# Altium PCB 手动分控1.0F.PcbDoc
Units mil, origin at the board's own origin, x right, y up, seen from the top; angles counter-clockwise.
Board outline 4830.86 x 2596.17 mil, 2 copper layers (Top Layer, Bottom Layer); 104 components, 86 nets, 354 pads, 39 vias.
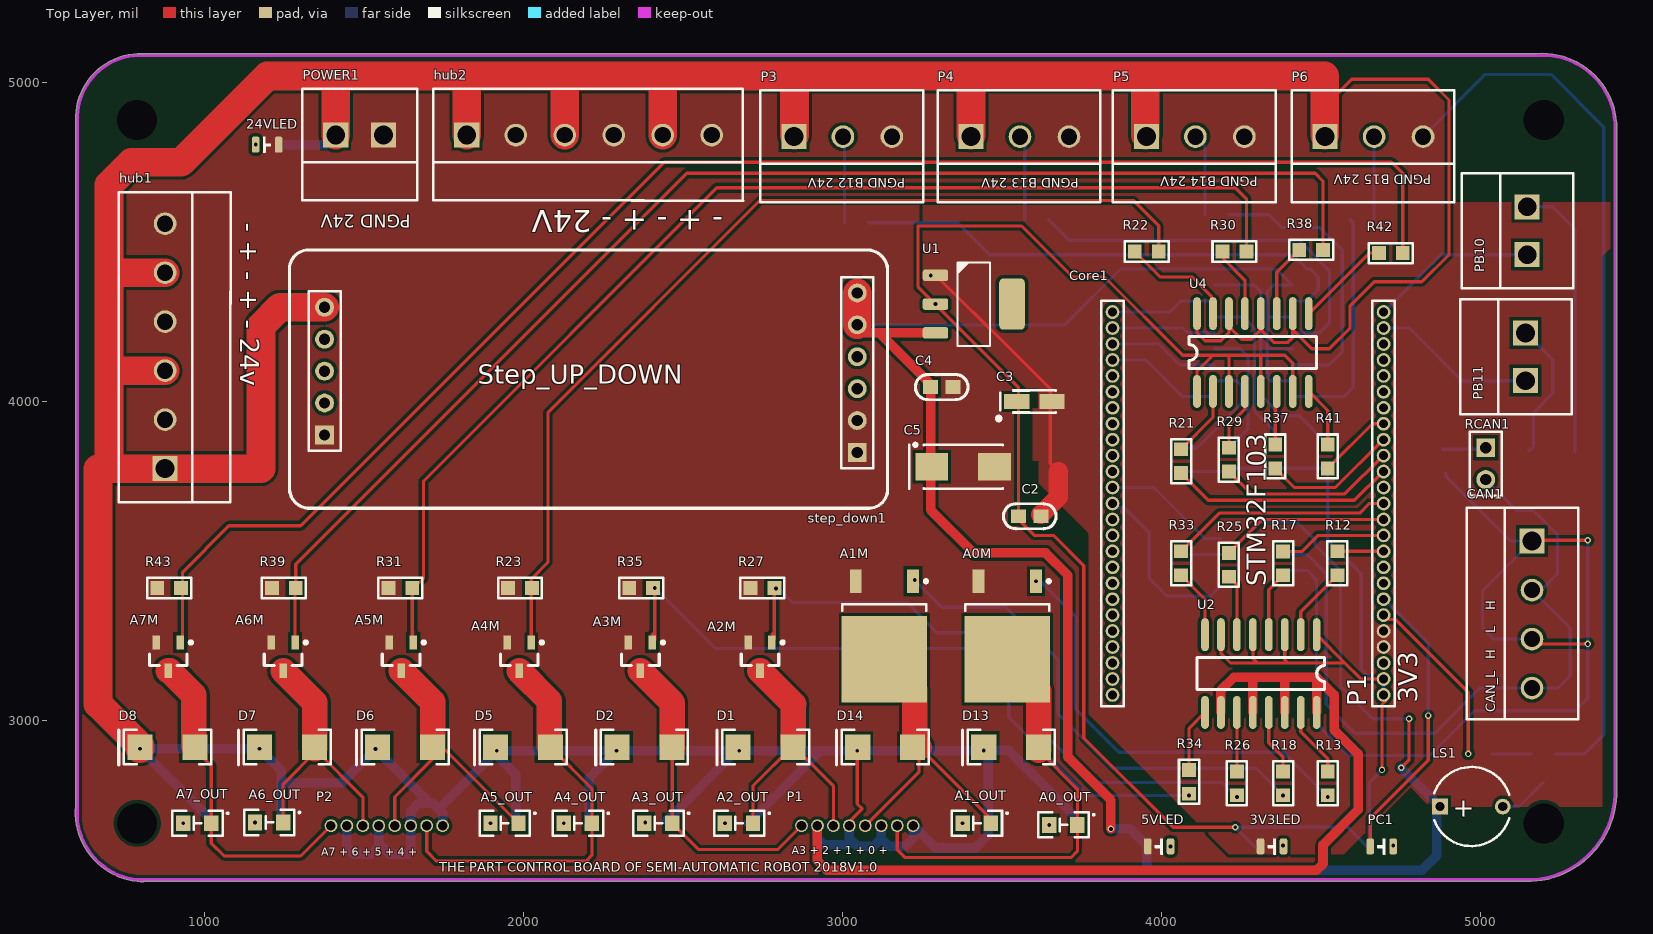
[diagram p0: Top Layer view]
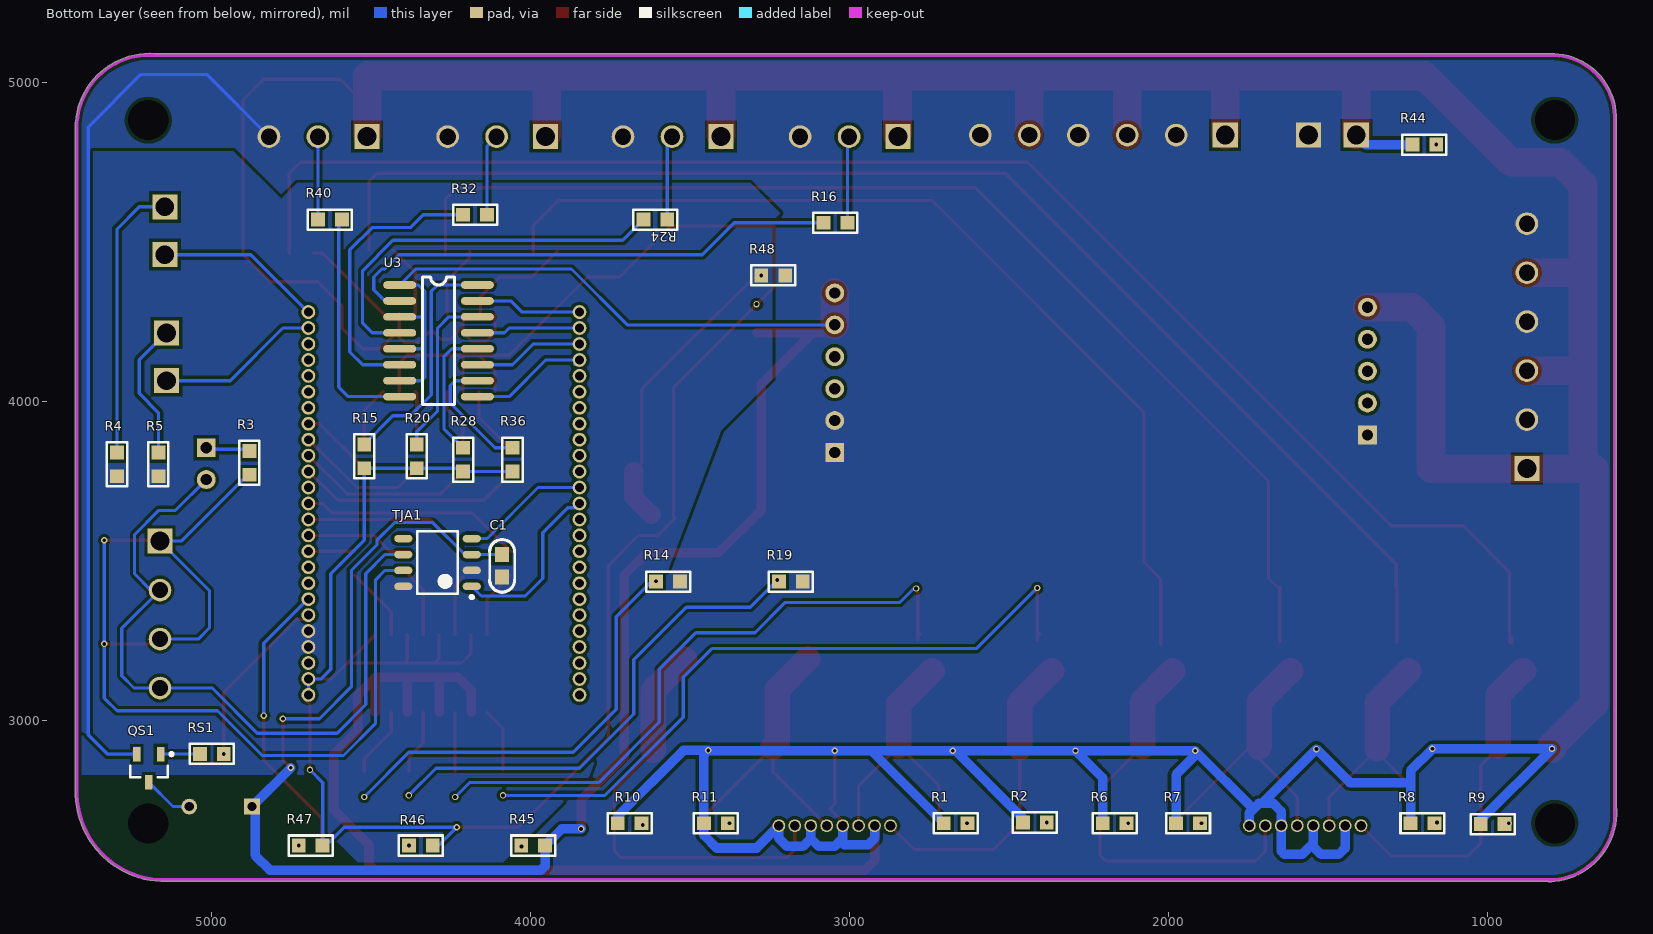
[diagram p1: Bottom Layer view, seen from below]

## Layer stack, top to bottom
Top Solder: solder mask 0.4, Solder Resist, Dk 3.5
Top Layer: signal copper 1.4
Dielectric1: dielectric 12.6, FR-4, Dk 4.8
Bottom Layer: signal copper 1.4
Bottom Solder: solder mask 0.4, Solder Resist, Dk 3.5

## Board outline
788.49,2495.51 ccw(c789.6,2500.4) 789.6,2495.39 789.77,2495.39 ccw(c809.8,2710.2) 804.87,2494.51 ccw(c804.99,2499.53) 807.82,2495.39 5155.93,2495.39 ccw(c5155.93,2500.4) 5156.12,2495.39 ccw(c5145.58,2774.8) 5425.01,2764.82 ccw(c5420,2765) 5425.02,2765 5425.02,4875 ccw(c5420,4875) 5425,4875.38 ccw(c5192.5,4857.5) 5174.81,5090.02 790,5090.02 ccw(c790,5085) 789.81,5090.01 ccw(c797.5,4887.5) 594.99,4879.9 594.99,2730.23 ccw(c809.8,2710.2) 594.99,2690.17 594.99,2690 ccw(c600,2690) 595.11,2688.9 ccw(c809.8,2710.2)

## Design rules (kind name [scope] priority, off if disabled: settings)
Clearance [All] p1: gap=10 ignorepadtopadclearanceinfootprint=FALSE except(0: Arc-Hole Track-Hole SMDPad-Hole THPad-THPad THPad-Hole Via-Hole Fill-Hole Poly-Hole Region-Hole Text-Hole)
HoleSize [All] p1 off: absolutevalues=TRUE maxlimit=100 minlimit=1 maxpercent=80.000 minpercent=20.000
HoleToHoleClearance [All] p1 off: gap=10 allowstackedmicrovias=TRUE
LayerPairs [All] p1 off: enforce=TRUE
MinimumSolderMaskSliver [All] p1 off: minsoldermaskwidth=10
NetAntennae [All] p1 off: netantennaetolerance=0
PlaneConnect [All] p1: planeconnectstyle=Direct reliefexpansion=20 reliefentries=4 reliefconductorwidth=10 reliefairgap=10
PolygonConnect [All] p1: connectstyle=Direct reliefconductorwidth=10 reliefentries=4 polygonreliefangle="90 Angle" airgapwidth=10
RoutingVias [All] p1: holewidth=28 width=50 viastyle="Through Hole" minholewidth=28 minwidth=50 maxholewidth=28 maxwidth=50
SilkToSilkClearance [All] p1 off: silktosilkclearance=10
SilkToSolderMaskClearance [IsPad] p1 off: minsilkscreentomaskgap=10 clearancetoexposedcopper=TRUE
SolderMaskExpansion [All] p1: expansion=4
Width [All] p1: maxlimit=100 minlimit=10 preferedwidth=10 minimp=50.000000 maximp=50.000000 favimp=50.000000
22 further rules are at their usual default settings.

## Components (designator, comment, footprint, x,y, rotation, side; value= is the part's Value field where it differs from the comment)
3V3LED "LED_0603" LED_0805_GREEN 4345,2605 r180 top (schematic designator 3)
5VLED "LED_0603" LED_0805_GREEN 3991,2605 r180 top (schematic designator 2)
24VLED "LED_0603" LED_0805_GREEN 1195,4805 r0 top (schematic designator 1)
A0_OUT "(BLUE)" LED-0805 3735,2672.63 r180 top (schematic designator D15)
A0M "MOSFET N" LR7843 3515,3265 r270 top (schematic designator Q7)
A1_OUT "(BLUE)" LED-0805 3463.2,2677.63 r180 top (schematic designator D16)
A1M "MOSFET N" LR7843 3130,3265 r270 top (schematic designator Q8)
A2_OUT "(BLUE)" LED-0805 2718,2677.63 r180 top (schematic designator D3)
A2M "MOSFET N" NMOS_SOT23 2740,3200 r270 top (schematic designator Q1)
A3_OUT "(BLUE)" LED-0805 2465,2677.63 r180 top (schematic designator D4)
A3M "MOSFET N" NMOS_SOT23 2365,3200 r270 top (schematic designator Q2)
A4_OUT "(BLUE)" LED-0805 2213,2677.63 r180 top (schematic designator D9)
A4M "MOSFET N" NMOS_SOT23 1985.24,3200 r270 top (schematic designator Q3)
A5_OUT "(BLUE)" LED-0805 1983,2677.63 r180 top (schematic designator D10)
A5M "MOSFET N" NMOS_SOT23 1615,3200 r270 top (schematic designator Q4)
A6_OUT "(BLUE)" LED-0805 1245,2680 r180 top (schematic designator D11)
A6M "MOSFET N" NMOS_SOT23 1245,3200 r270 top (schematic designator Q5)
A7_OUT "(BLUE)" LED-0805 1020,2677.63 r180 top (schematic designator D12)
A7M "MOSFET N" NMOS_SOT23 885,3200 r270 top (schematic designator Q6)
C1 "Cap" CAP-MLCC-0603 4087.72,3520 r270 bottom
C2 "Cap" CAP-MLCC-0603 3620.87,3640 r180 top
C3 "100μF" CAP-TAN-3216/CAPA 3545,4000 r180 top
C4 "Cap" CAP-MLCC-0603 3345,4045 r180 top value=0.1uF
C5 "Cap_Tan_0805" CAP-TAN-6032/CAPC 3278.15,3795 r180 top value=*μF
CAN1 "Header 4" Green_4P 5255,3487.09 r270 top
Core1 "STM32F103 SMALL" STM32F103Small 4295,3665 r90 top
D1 "ss34" ss34 2760,2920 r0 top
D2 "ss34" ss34 2380,2920 r0 top
D5 "ss34" ss34 2000,2920 r0 top
D6 "ss34" ss34 1630,2920 r0 top
D7 "ss34" ss34 1260,2920 r0 top
D8 "ss34" ss34 885,2920 r0 top
D13 "ss34" ss34 3530,2920 r0 top
D14 "ss34" ss34 3135,2920 r0 top
hub1 "Header 6" Green_6P 780,3864.37 r90 top
hub2 "Header 6" Green_6P 1895.83,4930 r0 top
LS1 "Bell" CAP-ELE-PIN200/DIA250 4970,2730 r0 top
P1 "HDR1x8_1.27" HDR1X8_1.27_180 3220,2670 r270 top
P2 "HDR1x8_1.27" HDR1X8_1.27_180 1745,2670 r270 top
P3 "HDR1x3_2.54" Green_3P 2921.46,4925 r0 top
P4 "HDR1x3_2.54" Green_3P 3476.46,4925 r0 top
P5 "HDR1x3_2.54" Green_3P 4026.46,4925 r0 top
P6 "HDR1x3_2.54" Green_3P 4586.46,4925 r0 top
PB10 "HDR1x2_2.54" Green_2P 5240,4535 r270 top (schematic designator P7)
PB11 "HDR1x2_2.54" Green_2P 5235,4140 r270 top (schematic designator P8)
PC1 "LED_0603" LED_0805_GREEN 4689,2605 r180 top
POWER1 "Header 2" Green_2P 1485,4930 r0 top
QS1 "8050" SOT-23B_N 5195,2850 r270 bottom
R1 "22.1kΩ" RES-0603 2628.39,2677.69 r0 bottom
R2 "22.1kΩ" RES-0603 2454.8,2680 r180 bottom
R3 "Res_0603" RES-0603 4880,3844.8 r270 bottom
R4 "1kΩ" RES-0603 5295,3765.2 r90 bottom
R5 "1kΩ" RES-0603 5165,3765.2 r90 bottom
R6 "22.1kΩ" RES-0603 2130,2677.69 r0 bottom
R7 "22.1kΩ" RES-0603 1974.8,2677.69 r180 bottom
R8 "22.1kΩ" RES-0603 1165,2677.69 r0 bottom
R9 "22.1kΩ" RES-0603 1020,2675 r180 bottom
R10 "22.1kΩ" RES-0603 3650.2,2677.69 r0 bottom
R11 "22.1kΩ" RES-0603 3455,2677.69 r180 bottom
R12 "RES" RES-0603 4550,3530 r270 top
R13 "1kΩ" RES-0603 4520,2840 r270 top
R14 "1kΩ" RES-0603 3530,3435 r0 bottom
R15 "RES" RES-0603 4520,3865 r270 bottom
R16 "RES" RES-0603 3005.2,4560 r0 bottom
R17 "RES" RES-0603 4380,3529.8 r270 top
R18 "1kΩ" RES-0603 4380,2840 r270 top
R19 "1kΩ" RES-0603 3145,3435 r0 bottom
R20 "RES" RES-0603 4355,3865 r270 bottom
R21 "RES" RES-0603 4060,3775.2 r90 top
R22 "2kΩ" RES-0603 3915,4470 r0 top
R23 "1kΩ" RES-0603 1950.2,3415 r0 top
R24 "RES" RES-0603 3570,4570 r0 bottom
R25 "330Ω" RES-0603 4210,3525 r270 top
R26 "2kΩ" RES-0603 4235,2840 r270 top
R27 "1kΩ" RES-0603 2710.2,3415 r0 top
R28 "RES" RES-0603 4210,3854.8 r270 bottom
R29 "RES" RES-0603 4210,3780 r90 top
R30 "2kΩ" RES-0603 4190,4470 r0 top
R31 "1kΩ" RES-0603 1575,3415 r0 top
R32 "1kΩ" RES-0603 4135,4585 r0 bottom
R33 "330Ω" RES-0603 4060,3530 r270 top
R34 "2kΩ" RES-0603 4085,2845 r270 top
R35 "1kΩ" RES-0603 2330,3415 r0 top
R36 "RES" RES-0603 4055,3854.8 r270 bottom
R37 "330Ω" RES-0603 4355,3790 r90 top
R38 "2kΩ" RES-0603 4430.2,4475 r0 top
R39 "1kΩ" RES-0603 1210,3415 r0 top
R40 "1kΩ" RES-0603 4664.8,4570 r180 bottom
R41 "330Ω" RES-0603 4520,3790 r90 top
R42 "2kΩ" RES-0603 4680.2,4465 r0 top
R43 "1kΩ" RES-0603 850.2,3415 r0 top
R44 "Res_0603" RES-0603 1159.2,4805 r0 bottom
R45 "Res_0603" RES-0603 4027.8,2607.69 r180 bottom
R46 "Res_0603" RES-0603 4380,2607.69 r180 bottom
R47 "Res_0603" RES-0603 4725,2607.69 r180 bottom
R48 "Res1" RES-0603 3275,4395 r180 bottom
RCAN1 "" HDR1X2 5015,3855 r270 top
RS1 "Res1" RES-0603 5034.8,2895 r180 bottom
step_down1 "Step_DOWN" Step_Up_Down 2180,4085 r0 top
TJA1 "TJA1050" TJA1050 4290,3495 r0 bottom
U1 "AMS1117" SOT223-3 3410,4305 r270 top
U2 "TLP281-4" SOP16 4485,3256.81 r270 top
U3 "TLP281-4" SOP16 4396.81,4365 r180 bottom
U4 "TLP281-4" SOP16 4110,4043.19 r90 top

## Footprints (in the part's own frame and the unit in brackets; to place one, negate y for a bottom-side part, rotate by r counter-clockwise, add the part's x,y. Pads: shape width x height; smd on the part's side, far side on the other; paste and mask are expansions set on the pad)
CAP-ELE-PIN200/DIA250 [mm] "Capacitor, Electrolytic, Radial; Body 6.3 x 5 mm (Dia.xH typ); Pin Spacing 5 mm (typ)"
  rect 1.25x1.25 hole 0.75: 1(-2.5,0)
  round 1.25 hole 0.75: 2(2.5,0)
  silkscreen extent -2.96,-3.15 3,3.15
CAP-MLCC-0603 [mm]
  rect 1.2x1.1 smd: 1(0,0) 2(1.8,0)
  silkscreen extent -1.2,-1 3,1, body extent 0.02,-0.48 1.78,0.47, height 0.85
CAP-TAN-3216/CAPA [mm]
  rect 2x1.2 smd: 1(0,0) 2(-2.8,0)
  silkscreen extent -3.1,-0.9 1.45,1.37
CAP-TAN-6032/CAPC [mm]
  rect 2.6x2.2 smd: 1(0,0) 2(-5,0)
  silkscreen extent -5.65,-1.87 1.8,1.75
Green_2P [mm]
  rect 2x2 hole 1.5: 1(-1.905,-2.413) 2(1.905,-2.413)
  silkscreen extent -4.57,-7.62 4.57,1.27
Green_3P [mm]
  rect 2x2 hole 1.5: 1(-1.905,-2.413)
  round 1.8 hole 1.3: 2(1.995,-2.413) 3(5.895,-2.413)
  silkscreen extent -4.57,-7.62 8.38,1.27
Green_4P [mm]
  rect 2x2 hole 1.5: 1(-1.905,-2.413)
  round 1.8 hole 1.3: 2(1.995,-2.413) 3(5.895,-2.413) 4(9.795,-2.413)
  silkscreen extent -4.57,-7.62 12.28,1.27
Green_6P [mm]
  rect 2x2 hole 1.5: 1(-1.905,-2.413)
  round 1.8 hole 1.3: 2(1.995,-2.413) 3(5.895,-2.413) 4(9.795,-2.413) 5(13.695,-2.413) 6(17.595,-2.413)
  silkscreen extent -4.57,-7.63 20.12,1.27
HDR1X2 [mm] "Connector; Header; 2 Position"
  rect 1.5x1.5 hole 0.9: 1(0,0)
  round 1.5 hole 0.9: 2(2.54,0)
  silkscreen extent -1.27,-1.27 3.81,1.27
HDR1X8_1.27_180 [mil]
  round 40 hole 30: 1(0,0) 2(0,-50) 3(0,-100) 4(0,-150) 5(0,-200) 6(0,-250) 7(0,-300) 8(0,-350)
  body extent -49,-375 49,25, height 210
LED-0805 [mil]
  rect 45x50 smd: 1(88,0) 2(0,0)
  silkscreen extent -52,-39 122,39
LED_0805_GREEN [mil]
  rrect50% 24x50 smd: 1(-36,0) 2(36,0)
  silkscreen extent -12,-24 12,24, body extent -40,-25 40,25, height 43
LR7843 [mm] "D-PAK, 3-Pads, Body 6.20x6.72mm (max), IPC Medium Density"
  rect 6.9x6.8 smd: D(1.85,0)
  rect 1.9x0.95 smd: G(-4.35,2.28) S(-4.35,-2.28)
  silkscreen extent -4.47,-3.35 -2,3.43, body extent -2.5,-3.35 3.7,3.35, height 2.38
NMOS_SOT23 [mm]
  rect 1.15x0.6 smd: D(1.125,0) G(-1.125,0.95) S(-1.125,-0.95)
  silkscreen extent -1.25,-1.5 0.7,1.93, body extent -0.7,-1.5 0.7,1.5, height 1.14
RES-0603 [mm]
  rect 1.1x1.1 smd: 1(0,0) 2(1.9,0)
  silkscreen extent -0.8,-0.8 2.7,0.8, body extent 0.1,-0.48 1.8,0.47, height 0.6
SOP16 [mil]
  oval 103.62x24 smd: 1(-11.81,0) 2(-11.81,-50) 3(-11.81,-100) 4(-11.81,-150) 5(-11.81,-200) 6(-11.81,-250) 7(-11.81,-300) 8(-11.81,-350) 9(231.81,-350) 10(231.81,-300) 11(231.81,-250) 12(231.81,-200) 13(231.81,-150) 14(231.81,-100) 15(231.81,-50) 16(231.81,0)
  silkscreen extent 60,-375 160,25
SOT223-3 [mil]
  rrect40% 36x80 smd: 1(-90.16,-120) 2(0,-120) 3(90.16,-120)
  rrect30% 160x80 smd: 4(0,120)
  silkscreen extent -131,-51 131,51, body extent -132,-144 132,144, height 71
SOT-23B_N [mm] "SOT23, 3-Leads, Body 2.9x1.3mm, Pitch 0.95mm, Lead Span 2.4mm, IPC Medium Density"
  rect 1.15x0.6 smd: 1(-1.125,0.95) 2(-1.125,-0.95) 3(1.125,0)
  silkscreen extent -1.25,-1.5 0.7,1.92, body extent -0.7,-1.5 0.7,1.5, height 1.14
ss34 [mm]
  rect 2x2 smd: A(2.125,-0.102) K(-2.25,-0.102)
  silkscreen extent -3.94,-1.52 3.4,1.3, body extent -2.48,-1.48 2.37,1.3, height 1.4
Step_Up_Down [mm]
  rect 1.5x1.5 hole 0.9: 1(-20.447,-4.826) 6(21.971,-6.223)
  round 1.5 hole 0.9: 2(-20.447,-2.286) 3(-20.447,0.254) 4(-20.447,2.794) 5(-20.447,5.334) 7(21.971,-3.683) 8(21.971,-1.143) 9(21.971,1.397) 10(21.971,3.937) 11(21.971,6.477)
  silkscreen extent -23.24,-10.67 24.38,9.91
STM32F103Small [mm]
  round 1.1 hole 0.7: 1(-14.859,-10.16) 2(-13.589,-10.16) 3(-12.319,-10.16) 4(-11.049,-10.16) 5(-9.779,-10.16) 6(-8.509,-10.16) 7(-7.239,-10.16) 8(-5.969,-10.16) 9(-4.699,-10.16) 10(-3.429,-10.16) 11(-2.159,-10.16) 12(-0.889,-10.16) 13(0.381,-10.16) 14(1.651,-10.16) 15(2.921,-10.16) 16(4.191,-10.16) 17(5.461,-10.16) 18(6.731,-10.16) 19(8.001,-10.16) 20(9.271,-10.16) 21(10.541,-10.16) 22(11.811,-10.16) 23(13.081,-10.16) 24(14.351,-10.16) 25(15.621,-10.16) 26(-14.859,11.43) 27(-13.589,11.43) 28(-12.319,11.43) 29(-11.049,11.43) 30(-9.779,11.43) 31(-8.509,11.43) 32(-7.239,11.43) 33(-5.969,11.43) 34(-4.699,11.43) 35(-3.429,11.43) 36(-2.159,11.43) 37(-0.889,11.43) 38(0.381,11.43) 39(1.651,11.43) 40(2.921,11.43) 41(4.191,11.43) 42(5.461,11.43) 43(6.731,11.43) 44(8.001,11.43) 45(9.271,11.43) 46(10.541,11.43) 47(11.811,11.43) 48(13.081,11.43) 49(14.351,11.43) 50(15.621,11.43)
  silkscreen extent -15.75,-11.05 16.51,12.32
TJA1050 [mm] "SOIC, 8-Leads, Body 4.90x3.90mm, Pitch 1.27mm, IPC Medium Density"
  oval 1.45x0.6 smd: 1(-2.725,1.905) 2(-2.725,0.635) 3(-2.725,-0.635) 4(-2.725,-1.905) 5(2.725,-1.905) 6(2.725,-0.635) 7(2.725,0.635) 8(2.725,1.905)
  silkscreen extent -2.85,-2.5 1.6,2.88, body extent -2,-2.5 2,2.5, height 1.75

## Part data
3V3LED 5VLED 24VLED PC1: "LED"
A0_OUT A1_OUT A2_OUT A3_OUT A4_OUT A5_OUT A6_OUT A7_OUT: library part LED, "LED"
A0M A1M A2M A3M A4M A5M A6M A7M: "IRF530"
C1 C2 C4 C5: "Capacitor"
  C4: LatestRevisionDate=17-Jul-2002, LatestRevisionNote="Re-released for DXP Platform.", PackageReference=RAD-0.3, Published=8-Jun-2000, Publisher="Altium Limited"
  C5: LatestRevisionDate=17-Jul-2002, LatestRevisionNote="Re-released for DXP Platform.", PackageDescription="Polarized Capacitor; 2 Leads", PackageReference=POLAR0.8, Published=8-Jun-2000, Publisher="Altium Limited"
C3: library part CAP-TAN, "钽电容"
CAN1: "Header, 4-Pin"
D1 D2 D5 D6 D7 D8 D13 D14: library part DIODE-Schottky, "肖特基二极管"
hub1 hub2: "Header, 6-Pin"
LS1: "Electrical Bell"
P1 P2 P3 P4 P5 P6 PB10 PB11: "Header"
POWER1: "Header, 2-Pin"
QS1: library part QNPN, "NPN Bipolar Transistor"
R1 R2 R4 R5 R6 R7 R8 R9 R10 R11 R13 R14 R18 R19 R22 R23 R25 R26 R27 R30 R31 R32 R33 R34 R35 R37 R38 R39 R40 R41 R42 R43: library part RES, "电阻"
R3 R44 R45 R46 R47 R48 RS1: "Resistor"
R12 R15 R16 R17 R20 R21 R24 R28 R29 R36: "电阻"
RCAN1: library part "Header 2", "Header, 2-Pin"
TJA1: "CAN总线收发器"
U1: library part AMS１１１７
U2 U3 U4: library part IC-TLP521-4, "TLP521-4,TLP281-4"

## Free pads (board coordinates)
  round 0 hole 125.98: 34(787.4,4881.89) 35(5196.85,4881.89) 36(5196.85,2677.17) 37(787.4,2677.17)

## Via types
v1: diameter 20, hole 12, Top Layer to Bottom Layer, 39 vias

## Nets (pads, with @x,y where several pads share a name; then routed paths per layer and width w, separated by ;. In a path a pad name is that pad's centre, name@x,y a point inside that pad or via, vN(x,y) a via of type N, cw(c..) or ccw(c..) an arc to the next point about the centre after c; other vN are vias at no path point)
3V3: C2.2 C3.1 Core1.1 Core1.2 R15.2 R20.2 R28.2 R36.2 R46.2 R47.2 U1.2 U2.1 U2.3 U2.5 U2.7 U4.1 U4.3 U4.5 U4.7 | length 7505
  Top Layer w10: C2.2@3545,3635 3600,3580 3660,3580 3755,3485 3755,2945 4035,2665 v1(4230,2665) ; C2.2 3550,4045 v1(3290,4305) 3235,4360 3235,4550 3560,4550 3720,4390 3820,4390 4065,4145 4160,4145 ; U4.1 4110,4095 4160,4145 ; U2.7 4185,3210 4215,3180 4300,3180 ; U4.3 4210,4145 ; U2.5 4285,3195 4300,3180 ; U4.5 4310,4145 ; U2.3 4385,3190 4395,3180 ; U4.7 4410,4120 4385,4145 4310,4145 ; U2.1 4573.62,3180 ; v1(4690,2845) 4690,3050 4700.18,3060.18 4700.18,3095.18 Core1.1@4700.74,3095.74 ; Core1.2 4623.62,3130 4573.62,3180 ; 4160,4145 4210,4145 ; 4210,4145 4310,4145 ; 4300,3180 4395,3180 ; 4395,3180 4573.62,3180
  Bottom Layer w10: R36.2 R28.2 4220.2,3790.2 R20.2 R15.2 4520,3565 4625,3460 4625,3160 4655,3130 Core1.2 Core1.1 ; R46.2@4305.2,2602.69 4292.31,2602.69 v1(4230,2665) 4582.89,2665 4650.2,2597.69 R47.2 4650.2,2805.2 v1(4690,2845)
5V: C1.1 C4.2 C5.1 LS1.1 R45.2 step_down1.10 step_down1.11 TJA1.3 U1.3 U3.1 U3.3 U3.5 U3.7 | length 7237.5
  Top Layer w10: v1(4750,2851.57) 4775,2876.57 v1(4775,3005)
  Top Layer w30: step_down1.10 3070.16,4214.84 3115.16,4214.84 ; U1.3 3115.16,4214.84 ; v1(3840,2660) 3840,2750 3705,2885 3705,3455 3635,3525 3410,3525 3275,3660 3275,4055 3115.16,4214.84
  Top Layer w90: step_down1.10 step_down1.11
  Bottom Layer w10: step_down1.10 3695,4240 3870,4415 4358.62,4415 U3.1 4350,4365 4330,4345 4330,4265 ; C1.1 TJA1.3 4205,3520 4305,3620 4425,3620 4480,3565 4480,3550 4560,3470 4560,3105 4660,3005 v1@4770,3005 ; U3.7@4360,4065 U3.7@4375,4065 ; U3.7 4340,4065 4330,4075 4330,4165 ; U3.5 4345,4165 4330,4165 ; U3.3 4330,4265 ; 4330,4165 4330,4265
  Bottom Layer w30: v1(3840,2660) 3900.69,2660 R45.2 3953,2543.17 3965.77,2530.4 4815.4,2530.4 4862,2577 4862,2720.43 LS1.1 v1(4750,2851.57)
24V: D1.K D2.K D5.K D6.K D7.K D8.K D13.K D14.K hub1.1 hub1.3 hub1.5 hub2.1 hub2.3 hub2.5 P1.1 P1.3 P1.5 P1.7 P2.1 P2.3 P2.5 P2.7 P3.1 P4.1 P5.1 P6.1 POWER1.1 R1.2 R2.1 R6.2 R7.1 R8.2 R9.1 R10.2 R11.1 R44.2 step_down1.5 U2.10 U2.12 U2.14 U2.16 U4.10 U4.12 U4.14 U4.16 | length 21209.8
  Top Layer w10: P1.5 3020,2682.8 3060,2722.8 3045,2737.8 v1(3045,2905) ; U4.16 4110,4215 4135,4190 4185,4190 4210,4215 U4.14@4210,4235 ; U4.14 U4.14@4210,4235 ; U4.12 U4.12@4310,4225 ; U4.10 U4.10@4410,4225 ; 4510,4925 4595,5010 4835,5010 4900,4945 4900,4460 4815,4375 4665,4375 4590,4300 4590,4230 4525,4165 4470,4165 U4.10@4410,4225 ; U4.14@4210,4235 4250,4195 4280,4195 U4.12@4310,4225 ; U4.12@4310,4225 4350,4185 4395,4185 4410,4200 U4.10@4410,4225
  Top Layer w30: P1.7 2920,2560 2949.6,2530.4 4485.4,2530.4 4505,2550 4505,2610 4615,2720 4615,2895 4540,2970 4540,3080 4485,3135 ; U2.10 4185,3095 4225,3135 4275,3135 ; U2.12 4285,3125 4275,3135 ; U2.14 4385,3125 4375,3135 ; U2.16 4485,3135 ; 4275,3135 4375,3135 ; 4375,3135 4485,3135
  Top Layer w80: 699.37,4095 700.83,4096.46 ; 699.37,4410 705.83,4403.54 ; 1815,5020 1820.83,5014.17 ; 2125,5020 2127.91,5017.09 ; 2420,5020 2435,5005 ; 2847.91,5002.91 2865,5020 ; 3401.46,5011.46 3410,5020 ; 3945,5020 3947.91,5017.09
  Top Layer w90: 700.83,4096.46 hub1.3 ; 705.83,4403.54 hub1.5 ; v1(796.4,2911) D8.K 796.4,2920.07 665,3051.47 665,3789.37 699.37,3789.37 ; step_down1.5 1235,4295 1175.63,4235.63 1175.63,3789.37 hub1.1 699.37,3789.37 ; POWER1.1 1410,5020 ; hub2.1 1820.83,5014.17 ; hub2.3 2127.91,5017.09 ; hub2.5 2435,5005 ; P3.1@2847.91,4835 2847.91,5002.91 ; P4.1@3401.46,4835 3401.46,5011.46 ; P5.1@3947.91,4835 3947.91,5017.09 ; P6.1@4510,4835 4510,4925 4510,5020 3945,5020 3410,5020 2865,5020 2420,5020 2125,5020 1815,5020 1410,5020 ; 699.37,3789.37 699.37,4095 699.37,4410 699.37,4679.37 770,4750 925,4750 1195,5020 1410,5020
  Bottom Layer w30: R9.1 1020,2687.4 v1(796.4,2911) v1(1171.4,2911) 1239.8,2842.6 1239.8,2805 ; R44.2 1380,4805 POWER1.1 ; R8.2 1239.8,2805 ; P2.7 1445,2600 1465,2580 1520,2580 1545,2605 1545,2615 ; P2.5 1545,2615 ; 1715,2740 1732.5,2722.5 ; P2.1 1745,2710 1732.5,2722.5 ; R7.1 1974.8,2830.2 1915,2890 v1(1915,2905) ; R6.2 2204.8,2819.8 v1(2290,2905) ; R2.1@2448.33,2686.47 v1@2666.86,2905 ; R1.2 2930.5,2905 ; P1.7 2920,2630 2940,2610 3015,2610 3020,2615 3020,2630 ; P1.5 3020,2630 ; P1.3 3120,2630 ; R10.2 3725,2700 3519,2906 v1(3441.4,2906) ; 1239.8,2805 1430,2805 v1(1535,2910) 1705,2740 1670,2740 1645,2715 P2.3 1645,2590 1635,2580 1580,2580 1545,2615 ; 1732.5,2722.5 v1(1915,2905) ; v1(1915,2905) v1(2290,2905) ; v1(2290,2905) v1@2666.86,2905 ; v1@2666.86,2905 v1(2675,2905) 2930.5,2905 ; 2930.5,2905 v1(3045,2905) 3440.4,2905 v1(3441.4,2906) ; 3020,2630 3045,2605 3095,2605 3120,2630 ; 3120,2630 3145,2605 3195,2605 3220,2630 P1.1 3290,2600 3415,2600 3455,2640 R11.1 3455,2892.4 v1(3441.4,2906)
A0: A0M.G R13.2 R14.2 | length 1365.2
  Bottom Layer w10: v1(3604.76,3436.26) 3618.74,3436.26 3730,3325 3730,3035 3865,2900 4380,2900 v1(4520,2760)
A0_OUT-: A0_OUT.2 A0M.D D13.A P1.2 | length 1351.9
  Top Layer w10: P1.2 3170,2595 3195,2570 3715,2570 3735,2590 A0_OUT.2 3735,2784.65 D13.A@3613.65,2906
  Top Layer w80: A0M.D 3613.65,3093.52 D13.A D13.A@3613.65,2906
A1: A1M.G R18.2 R19.2 | length 1551.1
  Bottom Layer w10: R19.2@3219.76,3425.24 3225,3430.47 v1(3225,3440) 3310,3355 3510,3355 3675,3190 3675,3020 3845,2850 4295,2850 v1(4380,2765)
A1_OUT-: A1_OUT.2 A1M.D D14.A P1.4 | length 968.4
  Top Layer w10: P1.4 3238.65,2838.65 3238.65,2916 3463.2,2691.45 A1_OUT.2
  Top Layer w80: A1M.D 3225,3097.17 3225,2929.65 D14.A@3238.65,2916
A2: A2M.G R26.2 R27.2 | length 1971.3
  Top Layer w10: 2777.4,3269.37 2784.8,3276.77 ; A2M.G@2784.8,3251.69 2784.8,3276.77 ; R27.2@2784.8,3400 2784.8,3276.77
  Bottom Layer w10: v1(2789.8,3413.5) 2796.69,3413.5 2840.2,3370 3200,3370 3295,3275 3480,3275 3595,3160 3595,2995 3785,2805 4190,2805 v1(4235,2760)
A2_OUT-: A2_OUT.2 A2M.D D1.A P1.6 | length 879.3
  Top Layer w10: A2_OUT.2 2718,2795.35 2843.65,2921 2970,2794.65 P1.6
  Top Layer w80: A2M.D 2845.71,3050 2843.65,3050 D1.A@2843.65,2921
A3: A3M.G R34.2 R35.2 | length 2184.7
  Top Layer w10: 2402.4,3269.17 2410,3276.77 ; A3M.G@2410,3251.89 2410,3276.77 ; v1(2410,3415) 2410,3276.77
  Bottom Layer w10: v1@2415,3411.02 2601.02,3225 3430,3225 3520,3135 3520,3010 3765,2765 v1(4085,2765)
A3_OUT-: A3_OUT.2 A3M.D D2.A P1.8 | length 989.8
  Top Layer w10: D2.A@2465,2914.65 A3_OUT.2 2547.63,2595 2795,2595 P1.8
  Top Layer w80: A3M.D 2465,3055.71 D2.A@2465,2914.65
A4: A4M.G R22.2 R23.2 | length 3052.2
  Top Layer w10: A4M.G@2022.64,3238.03 A4M.G 2022.64,3442.64 2075,3495 2075,3965 2740,4630 3910,4630 3989.8,4550.2 R22.2
A4_OUT-: A4_OUT.2 A4M.D D5.A P2.2 | length 1291.3
  Top Layer w10: P2.2 1695,2590 1726,2559 2195,2559 2213,2577 A4_OUT.2 2213,2786.65 D5.A D5.A@2080,2919.65
  Top Layer w80: A4M.D 2080,3060.94 D5.A@2080,2919.65
A5: A5M.G R30.2 R31.2 | length 3663.5
  Top Layer w10: R31.2@1649.8,3418.11 1658.11,3418.11 1685,3445 1685,3750 2605,4670 4230,4670 4264.8,4635.2 R30.2 ; A5M.G@1650,3246.69 1650,3276.77 ; R31.2@1650,3415 1650,3276.77 ; 1652.4,3274.37 1650,3276.77
A5_OUT-: A5_OUT.2 A5M.D D6.A P2.4 | length 915.2
  Top Layer w10: P2.4@1595,2660 P2.4 1595,2760 1711.41,2876.41 ; D6.A@1720,2895.47 1726.35,2900.76 1744.63,2916 A5_OUT.2
  Top Layer w80: A5M.D 1616.46,3155.71 1713.65,3058.52 D6.A
A6: A6M.G R38.2 R39.2 | length 4206
  Top Layer w10: A6M.G R39.2@1282.4,3422.4 ; R39.2 1284.8,3489.8 2510,4715 4480,4715 4505,4690 R38.2
A6_OUT-: A6_OUT.2 A6M.D D7.A P2.6 | length 857.5
  Top Layer w10: A6_OUT.2 1245,2800 D7.A@1349.82,2904.82 ; D7.A@1343.65,2911 D7.A@1349.82,2904.82 ; P2.6 1495,2759.65 D7.A@1349.82,2904.82
  Top Layer w80: A6M.D 1343.65,3057.06 D7.A D7.A@1343.65,2911
A7: A7M.G R42.2 R43.2 | length 4859.8
  Top Layer w10: A7M.G@922.4,3241.89 A7M.G A7M.G@922.4,3259.17 ; A7M.G@930,3244.29 930,3465 1075,3610 1300,3610 2440,4750 4720,4750 4755,4715 R42.2
A7_OUT-: A7_OUT.2 A7M.D D8.A P2.8 | length 1032.6
  Top Layer w10: D8.A@965,2920.6 964.22,2919.66 961.76,2916.69 1020,2858.45 A7_OUT.2 1020,2615 1060,2575 1300,2575 P2.8
  Top Layer w80: A7M.D 889.29,3155.71 965,3080 D8.A@965,2920.6
B12: P3.2 R16.1 | length 272.2
  Bottom Layer w10: P3.2 3005.2,4824.8 R16.1
B13: P4.2 R24.1 | length 266.2
  Bottom Layer w10: P4.2 3570,4815 R24.1
B14: P5.2 R32.1 | length 257.4
  Bottom Layer w10: P5.2 4135,4800 R32.1
B15: P6.2 R40.1 | length 260.1
  Bottom Layer w10: R40.1 4664.8,4829.8 P6.2
CAN_H: CAN1.1 CAN1.3 R3.2 TJA1.7 | length 3230.7
  Top Layer w10: CAN1.3 5175,3240 v1(5335,3240) ; CAN1.1 5162.91,3565 v1(5335,3565)
  Bottom Layer w10: TJA1.7@4405,3470 4455,3470 4485,3440 4485,2990 4585,2890 4840,2890 4980,3030 5295,3030 5335,3070 v1(5335,3240) v1(5335,3565) ; R3.2@4890,3775 4890,3765 5092.91,3562.09 CAN1.1 5005,3407.09 5005,3290 5040,3255 CAN1.3
CAN_L: CAN1.2 CAN1.4 RCAN1.2 TJA1.6 | length 2281.8
  Bottom Layer w10: TJA1.6 4455,3520 4515,3460 4515,3050 4605,2960 4855,2960 4996.46,3101.46 CAN1.4 5241.46,3101.46 5280,3140 5280,3288.54 CAN1.2 5188.54,3408.54 5240,3460 5240,3582.04 5163.52,3658.52 5111.48,3658.52 RCAN1.2 RCAN1.2@5005,3765
CAN_RX: Core1.39 TJA1.4 | length 404
  Bottom Layer w10: Core1.39 3975,3730 4135,3570 TJA1.4
CAN_TX: Core1.38 TJA1.1 | length 554.2
  Bottom Layer w10: Core1.38 3858.35,3666.65 3881.65,3666.65 3960,3588.31 3960,3445 4015,3390 4152.72,3390 TJA1.1
GND: 3V3LED.2 C1.2 C2.1 C3.2 Core1.4 Core1.5 R4.1 R5.1 R48.1 TJA1.2 TJA1.8 U1.1 | length 948.4
  Top Layer w10: U1.1@3280,4405.16 3282.53,4402.69 3290.1,4395.26 3520,4170.16 3650,4040.16 3650,3805.24 3675.24,3780 3675,3780
  Top Layer w60: C2.1@3620,3645 3675,3700 3675,3780
  other v1: 3275,4395
Net1_1: 24VLED.1 R44.1
  other v1: 1159.2,4805
Net2_1: 5VLED.1 R45.1
  other v1: 4027,2605
Net3_1: 3V3LED.1 R46.1
  other v1: 4380,2607.69
NetD3_1: A2_OUT.1 R1.1
  other v1: 2630,2677.63
NetD4_1: A3_OUT.1 R2.2
  other v1: 2380,2680
NetD9_1: A4_OUT.1 R6.1
  other v1: 2125,2677.63
NetD10_1: A5_OUT.1 R7.2
  other v1: 1895,2677.63
NetD11_1: A6_OUT.1 R8.1
  other v1: 1157,2680
NetD12_1: A7_OUT.1 R9.2
  other v1: 932,2677.63
NetD15_1: A0_OUT.1 R10.1
  other v1: 3647,2672.63
NetD16_1: A1_OUT.1 R11.2
  other v1: 3375.2,2677.63
NetLS1_2: LS1.2 QS1.3 | length 157.9
  Bottom Layer w10: LS1.2 5119.29,2730 QS1.3
NetP7_1: PB10.1 R4.2 | length 879
  Bottom Layer w10: PB10.1 5225,4610 5295,4540 R4.2
NetP8_1: PB11.1 R5.2 | length 436.3
  Bottom Layer w10: PB11.1 5225,4130 5225,4025 5165,3965 5165,3860 R5.2@5150,3845
NetPC1_1: PC1.1 R47.1
  other v1: 4725,2607.69
NetQS1_1: QS1.1 RS1.1 | length 123.1
  Bottom Layer w10: RS1.1 5035.51,2894.29 QS1.1
NetR3_1: R3.1 RCAN1.1 | length 137.1
  Bottom Layer w10: R3.1@4880,3850 4985.2,3850 4990.2,3855 RCAN1.1
NetR12_2: R12.2 U2.2 | length 234.2
  Top Layer w10: U2.2 4435,3340.2 R12.2
NetR13_1: R13.1 U2.15 | length 220.2
  Top Layer w10: U2.15 4435,2965 4520,2880 R13.1
NetR15_1: R15.1 U3.16 | length 752.5
  Bottom Layer w10: U3.16 4290,4365 4310,4345 4310,4020 4375,3955 4430,3955 R15.1
NetR16_2: R16.2 U3.2 | length 1616.3
  Bottom Layer w10: R16.2 3360,4560 3460,4460 4410,4460 4455,4415 4465,4415 4490,4390 4490,4350 4455,4315 U3.2
NetR17_2: R17.2 U2.4 | length 205
  Top Layer w10: U2.4 4335,3410 R17.2
NetR18_1: R18.1 U2.13 | length 203.6
  Top Layer w10: U2.13 4335,2930 4380,2885 R18.1
NetR20_1: R20.1 U3.14 | length 531.4
  Bottom Layer w10: U3.14 4255,4265 4290,4230 4290,3970 4355,3905 R20.1
NetR21_2: R21.2 U4.2 | length 222.8
  Top Layer w10: R21.2 4160,3950 U4.2
NetR22_1: R22.1 U4.15 | length 355.1
  Top Layer w10: R22.1 3995,4390 4095,4390 4155,4330 4155,4280 U4.15
NetR24_2: R24.2 U3.4 | length 1240.3
  Bottom Layer w10: R24.2 3709.8,4505 4430,4505 4525,4410 4525,4245 4495,4215 U3.4
NetR25_2: R25.2 U2.6 | length 191.9
  Top Layer w10: R25.2 4235,3425.2 U2.6
NetR26_1: R26.1 U2.11 | length 185
  Top Layer w10: R26.1 U2.11
NetR28_1: R28.1 U3.12 | length 425.4
  Bottom Layer w10: U3.12 4245,4165 4270,4140 4270,3914.8 R28.1
NetR29_2: R29.2 U4.4 | length 197.3
  Top Layer w10: R29.2 4210,3925 4260,3975 U4.4
NetR30_1: R30.1 U4.13 | length 224
  Top Layer w10: R30.1 4190,4450 4260,4380 U4.13
NetR32_2: R32.2 U3.6 | length 893.7
  Bottom Layer w10: R32.2 4335,4585 4375,4545 4495,4545 4565,4475 4565,4155 4525,4115 U3.6
NetR33_2: R33.2 U2.8 | length 217.6
  Top Layer w10: R33.2 4135,3380.2 U2.8
NetR34_1: R34.1 U2.9 | length 200.7
  Top Layer w10: R34.1 4085,2975 U2.9
NetR36_1: R36.1 U3.10 | length 399.3
  Bottom Layer w10: R36.1 4109.8,3854.8 4250,3995 4250,4050 4235,4065 U3.10
NetR37_2: R37.2 U4.6 | length 168.6
  Top Layer w10: R37.2 4355,4026.38 U4.6
NetR38_1: R38.1 U4.11 | length 229.1
  Top Layer w10: U4.11 4360,4404.8 R38.1
NetR40_2: R40.2 U3.8 | length 732.9
  Bottom Layer w10: U3.8 4570,4015 4600,4045 4600,4560 R40.2
NetR41_2: R41.2 U4.8 | length 191.4
  Top Layer w10: U4.8 4520,3971.38 R41.2
NetR42_1: R42.1 U4.9 | length 298.9
  Top Layer w10: U4.9 4650,4465 R42.1
PA0: Core1.10 R12.1 | length 145
  Top Layer w10: R12.1 Core1.10
PA1: Core1.11 R17.1 | length 335.8
  Top Layer w10: R17.1 4439.8,3529.8 4490,3580 Core1.11
PA2: Core1.12 R25.1 | length 528.5
  Top Layer w10: R25.1 4315,3630 Core1.12
PA3: Core1.13 R33.1 | length 697.1
  Top Layer w10: R33.1 4180,3650 4620,3650 4650,3680 Core1.13
PA4: Core1.15 R21.1 | length 707.6
  Top Layer w10: R21.1 4145.2,3690 4603.16,3690 4693.16,3780 Core1.15
PA5: Core1.16 R29.1 | length 563.7
  Top Layer w10: R29.1 4280,3710 4573.16,3710 4693.16,3830 Core1.16
PA6: Core1.17 R37.1 | length 427
  Top Layer w10: R37.1 4415,3730 4543.16,3730 4693.16,3880 Core1.17
PA7: Core1.18 R41.1 | length 233
  Top Layer w10: R41.1 4660,3930 Core1.18
PB10: Core1.25 PB10.2 | length 524.6
  Bottom Layer w10: Core1.25 4875,4460 PB10.2
PB11: Core1.24 PB11.2 | length 513.3
  Bottom Layer w10: Core1.24 4775,4230 4940,4065 PB11.2
PB12: Core1.50 U3.15 | length 334.5
  Bottom Layer w10: Core1.50 4025,4280 4060,4315 U3.15
PB13: Core1.49 U3.13 | length 333.3
  Bottom Layer w10: Core1.49@3850,4225 Core1.49 4065,4230 4080,4215 U3.13
PB14: Core1.48 U3.11 | length 346.9
  Bottom Layer w10: Core1.48 3990,4180 4055,4115 U3.11
PB15: Core1.47 U3.9 | length 369.5
  Bottom Layer w10: Core1.47 3950,4130 4065,4015 U3.9 ; Core1.47@3858.35,4116.65 Core1.47@3860.18,4116.65
PC1: Core1.7 PC1.2 | length 919.5
  Top Layer w10: PC1.2@4653,2595 PC1.2 4653,2693 4835,2875 v1(4835,3015)
  Bottom Layer w10: Core1.7 4696.84,3380 4835,3241.84 v1(4835,3015)
PGND: 5VLED.2 24VLED.2 A0M.S A1M.S A2M.S A3M.S A4M.S A5M.S A6M.S A7M.S C4.1 C5.2 hub1.2 hub1.4 hub1.6 hub2.2 hub2.4 hub2.6 P3.3 P4.3 P5.3 P6.3 POWER1.2 QS1.2 R14.1 R19.1 R23.1 R27.1 R31.1 R35.1 R39.1 R43.1 R48.2 step_down1.1 step_down1.6 step_down1.7 | length 2798.3
  Bottom Layer w10: P6.3 5013.54,5025 5220,5025 5385,4860 5385,2955 5324.29,2894.29 QS1.2
RING: Core1.6 RS1.2 | length 558.4
  Top Layer w10: Core1.6 4708.35,3316.65 4731.65,3316.65 4960,3088.31 v1(4960,2895)
pads on no net: Core1.3 Core1.8 Core1.9 Core1.14 Core1.19 Core1.20 Core1.21 Core1.22 Core1.23 Core1.26 Core1.27 Core1.28 Core1.29 Core1.30 Core1.31 Core1.32 Core1.33 Core1.34 Core1.35 Core1.36 Core1.37 Core1.40 Core1.41 Core1.42 Core1.43 Core1.44 Core1.45 Core1.46 step_down1.2 step_down1.3 step_down1.4 step_down1.8 step_down1.9 TJA1.5 U1.4

## Polygon pours and split planes (outlines as drawn)
GND on Bottom Layer "Bottom Layer-GND" (solid, remove dead copper, pour order 48): 3815,2825 4110,2530 4515,2530 4660,2675 4660,2830 5635,2830 5710,2905 5555,3060 5555,4785 4930,4785 4780,4635 4730,4685 3310,4685 3215,4590 3240,4565 3240,4070 3400,3910
PGND on Bottom Layer "Bottom Layer-PGND" (solid, remove dead copper, pour order 58): 155,2220 5745,2220 6040,2515 6040,6020 815,6020 480,5685
PGND on Top Layer "Top Layer-PGND" (solid, remove dead copper, pour order 64): 400,2460 435,2495 5600,2495 5600,5275 5555,5230 495,5230
GND on Top Layer "Top Layer-GND" (solid, remove dead copper, pour order 52): 3192.73,4002.73 3250,4060 3250,4625 5550,4625 5380,4455 5380,2730 4840,2730 4780,2790 4570,2580 4210,2580 3620,3170 3620,3490

## Keep-outs
Keep-Out Layer:
  lines w10: 600,2690 600,4895 ; 600,2730 ccw(c809.8,2710.2) 804.99,2499.53 ; 600,4880 cw(c797.5,4887.5) 790,5085 5210,5085 ; 789.6,2500.4 5155.93,2500.4 ccw(c5145.58,2774.8) 5420,2765 5420,4875 ccw(c5192.5,4857.5) 5175,5085

## Silkscreen, mask and mechanical layers (free items; w line width, h text height)
Top Overlay:
  text "PGND B15 24V" at 4845,4710 h30 r180
  text "PGND B14 24V" at 4300,4705 h30 r180
  text "PGND B12 24V" at 3195,4700 h30 r180
  text "PGND B13 24V" at 3740,4700 h30 r180
  text "- + - + - 24V" at 2625,4600 h70 r180
  text "PGND 24V" at 1645,4585 h40 r180
  text "- + - + - 24v" at 1110,4560 h60 r270
  text "CAN_L   H    L    H" at 5045,3025 h30 r90
  text "A3 + 2 + 1 + 0 +" at 2840,2580 h25
  text "A7 + 6 + 5 + 4 +" at 1365,2575 h25
  text "THE PART CONTROL BOARD OF SEMI-AUTOMATIC ROBOT 2018V1.0" at 1735,2525 h30
Top Solder:
  lines w10: 705,4670 705,4690 ; 1974.37,4834.37 1975,4835 1975,4845
  lines w70: 705,4670 695,4660 695,3790 859.37,3790 ; 705,4690 765,4750 920,4750 1190,5020 2435,5020 2435,4835 ; 708.54,4096.46 875,4096.46 ; 711.46,4403.54 875,4403.54 ; 1410,4835 1410,5015 ; 1820.83,4835 1820.83,5019.17 ; 2127.91,4835 2127.91,5017.09
  lines w80: 872.91,3945 1025,3945 1025,4625 1080,4680 2595,4680 2595,4828.54 2588.54,4835 ; 875,4250 1020,4250 ; 875,4557.09 1007.91,4557.09 ; 1560,4695 1560,4835 ; 1974.37,4690.63 1974.37,4835 ; 2281.46,4676.46 2281.46,4835
Bottom Solder:
  lines w10: 695,3795 700.63,3789.37
  lines w70: 696.46,4403.54 880,4403.54 ; 706.46,4096.46 875,4096.46 ; 875,3789.37 700.63,3789.37 700.63,4680.63 770,4750 925,4750 1200,5025 2435,5025 2435,4835 ; 1410,4835 1410,5015 ; 1820.83,4835 1820.83,5025.83 ; 2127.91,4835 2127.91,5017.09
  lines w80: 875,3942.91 1025,3942.91 1025,4620 1090,4685 2595,4685 2595,4828.54 ; 875,4250 1025,4250 ; 875,4557.09 1027.91,4557.09 ; 1560,4680 1560,4825 ; 1974.37,4685.63 1974.37,4835 ; 2281.46,4688.54 2281.46,4835

## Text inside footprints (layer, text, board x,y; h text height)
Core1: Top Overlay "3V3" at 4800,3055 h60 r90; Top Overlay "P1" at 4640,3045 h60 r90; Top Overlay "STM32F103" at 4325,3420 h60 r90
LS1: Top Overlay "+" at 4910.94,2698.5 h59.06
step_down1: Top Overlay "Step_UP_DOWN" at 1855,4055 h60